# Altium PCB Rackmount_DSP.PcbDoc (part 8 of 24)
Units mil, origin at the board's own origin, x right, y up, seen from the top; angles counter-clockwise.
Board outline 10629.92 x 8267.72 mil, 4 copper layers (Top Layer, Mid Layer 1, Mid Layer 2, Bottom Layer), stack 36.2 mil thick; 4500 components, 1565 nets, 9765 pads, 3289 vias.
Unrouted connection lines stored in the file: 1.
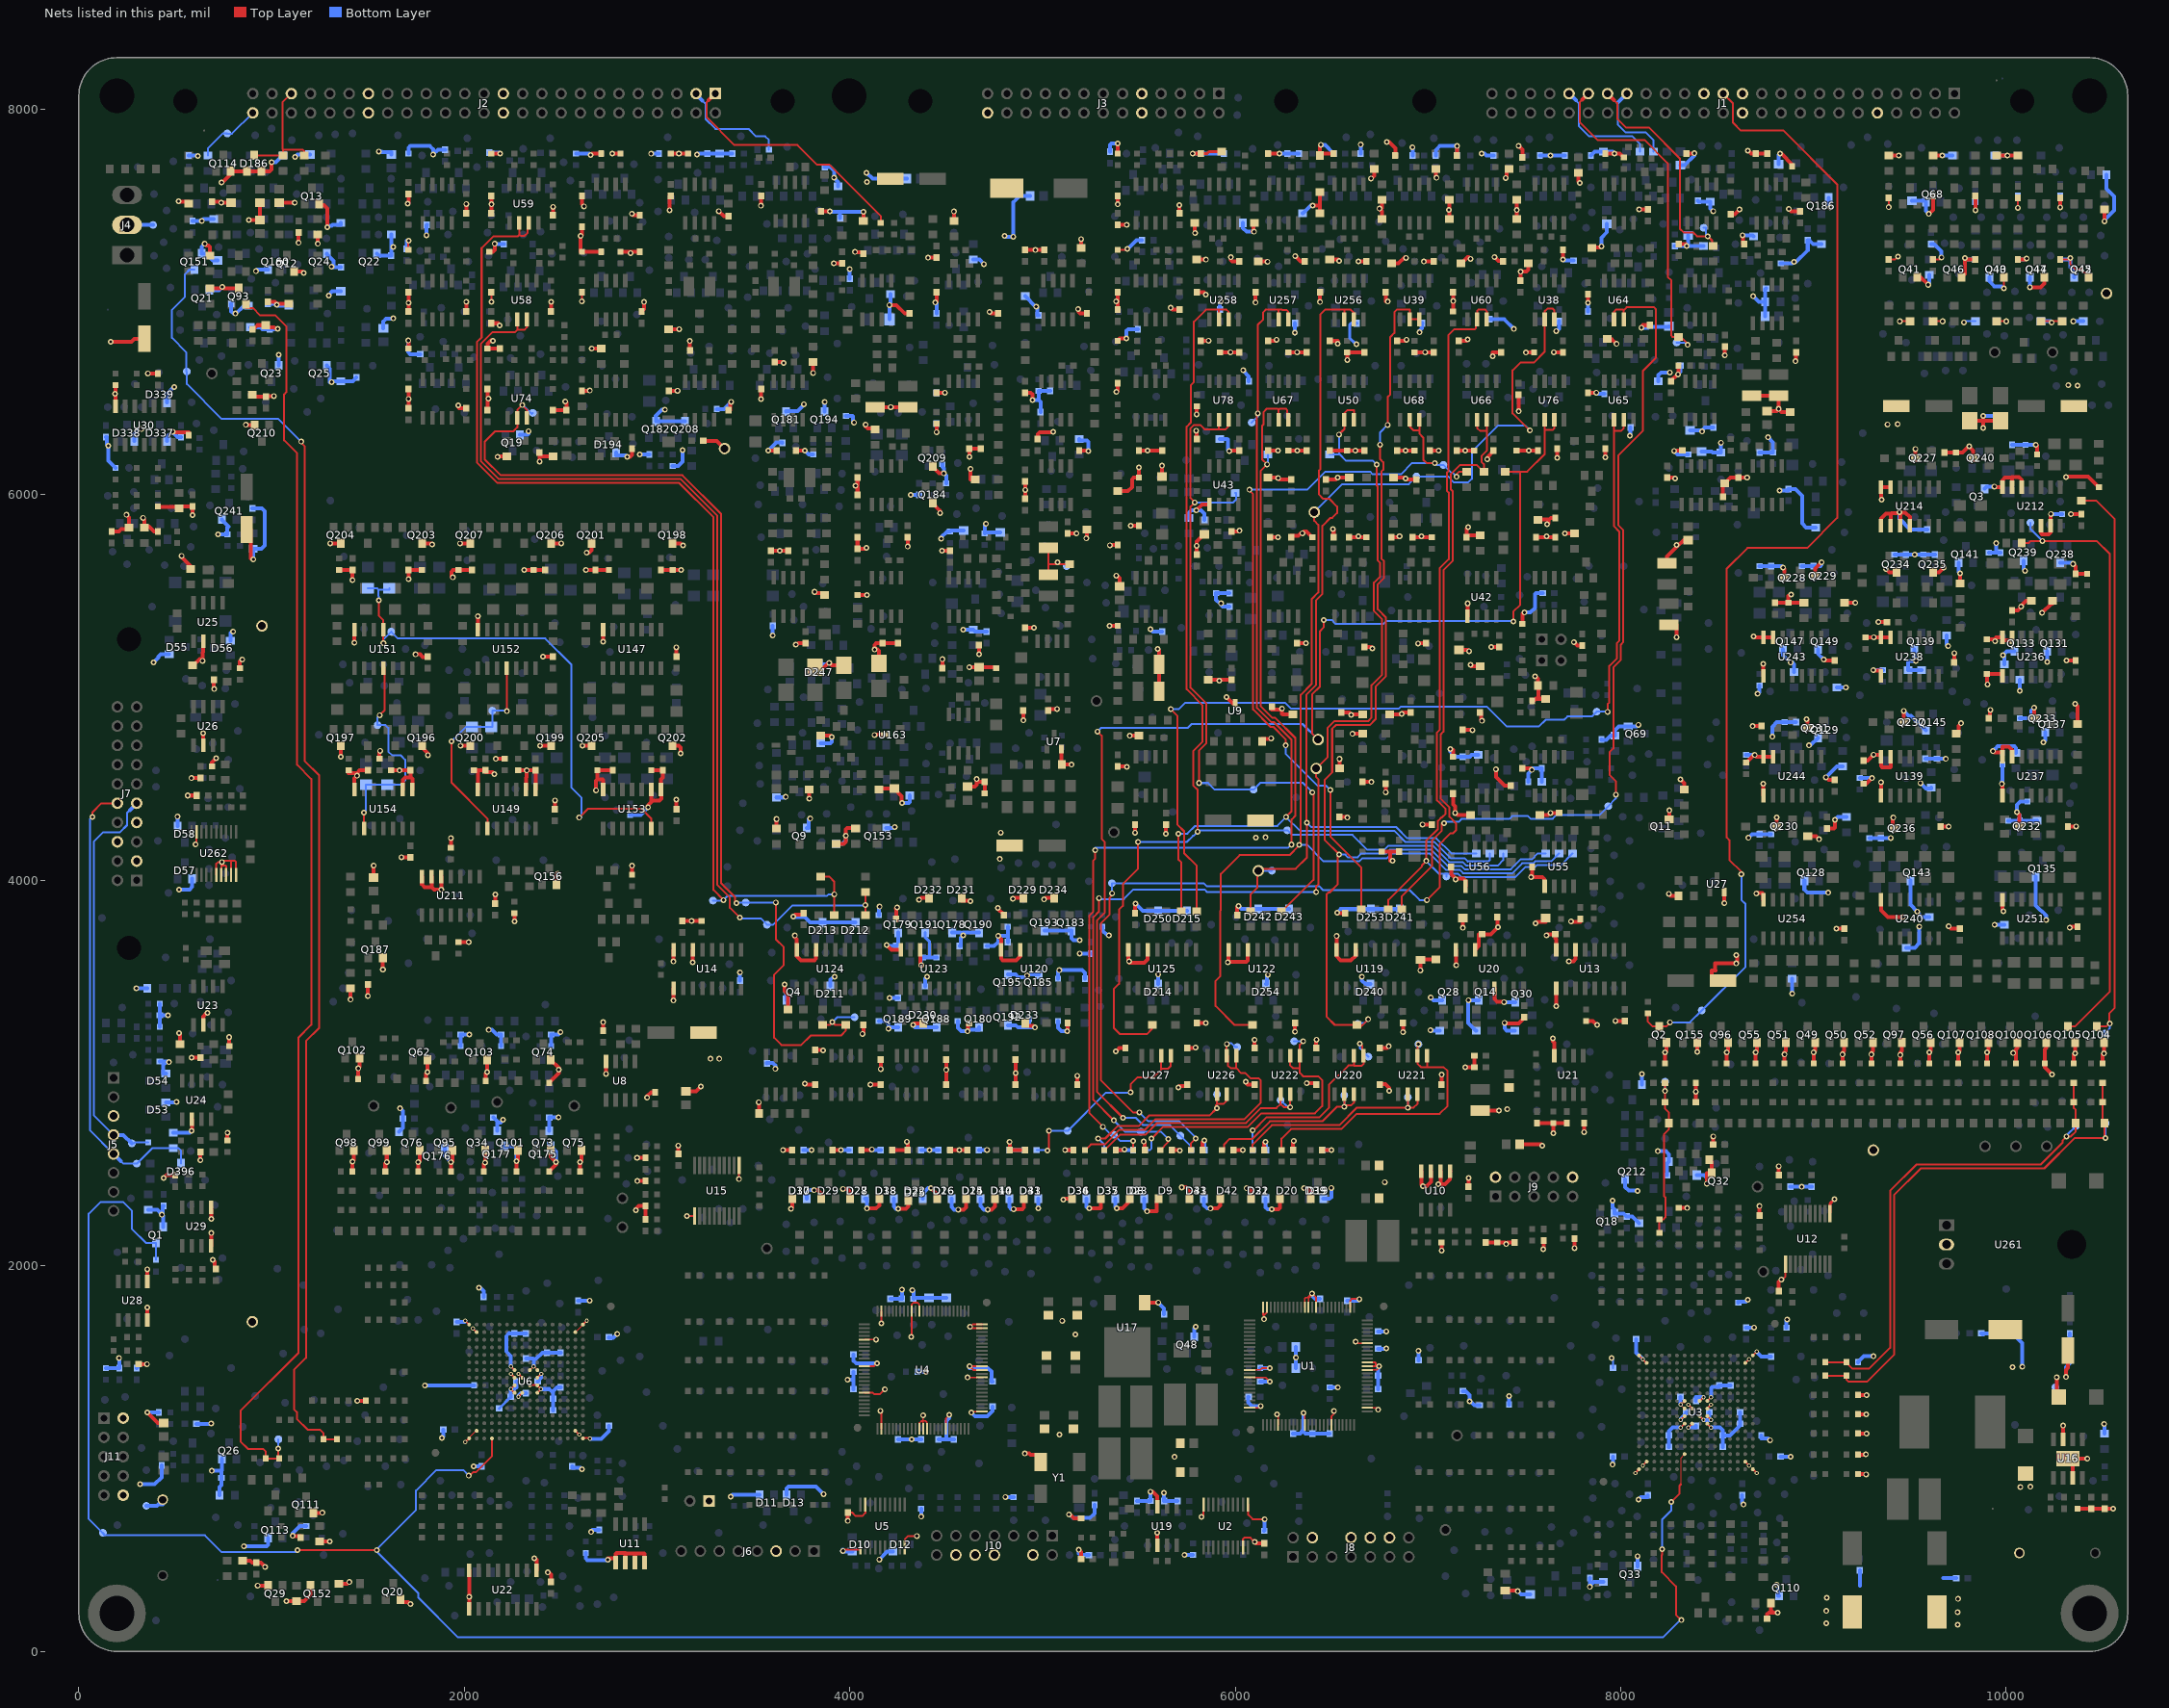
[diagram p10: the nets of this part, all layers, seen from the top]

## Via types
v1: diameter 30, hole 16, Top Layer to Bottom Layer, 3143 vias
v2: diameter 22, hole 12, Top Layer to Bottom Layer, 146 vias

## Nets (pads, with @x,y where several pads share a name; then routed paths per layer and width w, separated by ;. In a path a pad name is that pad's centre, name@x,y a point inside that pad or via, vN(x,y) a via of type N, cw(c..) or ccw(c..) an arc to the next point about the centre after c; other vN are vias at no path point) (continued)
D4_A: R2352.1 R2667.1 TP1574.1 U149.9 U152.11 | length 1155
  Top Layer w10: v1(1933.64,4720.82) 1933.64,4506.06 2120,4319.7 U149.9@2120,4270 ; v1(2220,4877.54) U152.11@2220,5100
  Bottom Layer w10: v1(1933.64,4720.82) 2007.82,4795 R2667.1@2040,4795 R2352.1@2140,4795 2145,4795 TP1574.1@2145,4880 2220,4880 v1(2220,4877.54)
D4_B: R2348.1 R2678.1 TP1575.1 U151.4 U153.13 | length 2781.4
  Top Layer w10: v1(1555.58,5452.21) 1555.58,5374.42 1580,5350 U151.4@1580,5300 v1(1580,5230.27) ; v1(2596.39,4325.61) 2642.54,4371.76 2918.24,4371.76 2970,4320 U153.13@2970,4270
  Bottom Layer w10: R2348.1@1500,5515 1546.5,5515 1554.66,5506.84 ; v1(1555.58,5452.21) 1555.58,5473.28 1554.66,5474.2 1554.66,5506.84 ; v1(1580,5230.27) 1580,5250 TP1575.1@1620,5290 1655,5255 2419.57,5255 2554.16,5120.41 2554.16,4483.07 2607.46,4429.78 2607.46,4325.61 v1(2596.39,4325.61) ; R2678.1@1610,5515 1610,5506.84 1554.66,5506.84
D4_C: R2679.1 R2680.1 TP1576.1 U151.11 U154.9 | length 1155.3
  Top Layer w10: v1(1479.14,4350.74) 1479.14,4270 U154.9@1480,4270 ; v1(1560.24,4856.69) 1586.3,4882.74 1586.3,5100 U151.11@1580,5100
  Bottom Layer w10: v1(1479.14,4350.74) 1490,4361.6 R2679.1@1490,4495 R2680.1@1600,4495 1600.56,4495.56 1669.97,4495.56 1693.22,4518.81 1693.22,4625.37 1671.09,4647.5 1626.67,4647.5 1605.99,4668.18 1605.99,4789.97 1590.96,4805 TP1576.1@1550,4805 1550,4846.45 v1(1560.24,4856.69)
DCBAT+: J1.35 R800.1 TP334.1 | length 458.3
  Bottom Layer w10: 7985.17,8035.17 7985.17,7919.13 8023.73,7880.57 8128.01,7880.57 8170,7838.58 R800.1@8170,7780 ; TP334.1@8030,8080 J1.35@8031.5,8081.5
  Bottom Layer w20: 7985.17,8035.17 TP334.1@8030,8080
DCBAT-: J1.37 R834.1 TP515.1 | length 1213.3
  Top Layer w10: 7964.28,8048.71 7981.5,8031.5 7981.5,7950.89 8026.55,7905.84 8146.24,7905.84 8306.58,7745.49 8306.58,7380.71 8327.29,7360 8376.93,7360 8395.41,7341.52 v1(8450.92,7341.52) 8474.12,7318.32 8474.12,7290 R834.1@8480,7290
  Top Layer w20: J1.37@7931.5,8081.5 7964.28,8048.71
  Bottom Layer w10: TP515.1@8430,7385 8442.44,7385 8442.44,7350 v1(8450.92,7341.52)
DCBUS+: J1.39 R797.1 TP516.1 | length 1784.3
  Top Layer w10: 7800.17,8050.17 7786.5,8036.5 7786.5,7933.88 7879.22,7841.15 8122.72,7841.15 8244.26,7719.61 8244.26,7130.66 8262.18,7112.74 8262.18,6825.66 8267.84,6820 R797.1@8300,6820 8302.5,6820 8312.73,6809.77 8320.9,6809.77 8347.31,6783.36 v1(8347.31,6778.11)
  Top Layer w20: 7800.17,8050.17 J1.39@7831.5,8081.5
  Bottom Layer w10: TP516.1@8290,6790 8335.42,6790 v1(8347.31,6778.11)
DCBUS+OVP: J2.1 R794.1 TP517.1 | length 1300.5
  Top Layer w10: 3267.86,8046.99 3257.36,8036.5 3257.36,7958.49 3401.74,7814.11 3728.18,7814.11 3830.51,7711.78 3895.14,7711.78 4162.33,7444.6 4162.33,7410 R794.1@4160,7410
  Top Layer w20: 3267.86,8046.99 J2.1@3302.36,8081.5
  Bottom Layer w10: J2.1@3302.36,8081.5 3305,8081.5 TP517.1@3305,8080
DCBUS-: J1.41 R832.1 TP333.1 | length 587.5
  Bottom Layer w10: TP333.1@7730,8080 J1.41@7731.5,8081.5 ; 7766.58,8046.42 7781.5,8031.5 7781.5,7913.5 7834.58,7860.42 8058.56,7860.42 8100,7818.97 R832.1@8100,7780
  Bottom Layer w20: J1.41@7731.5,8081.5 7766.58,8046.42
DCBUS-OVP: J2.3 R853.1 TP332.1 | length 579.8
  Bottom Layer w10: TP332.1@3200,8080 3200,8081.5 J2.3@3202.36,8081.5 ; 3235.55,8044.45 3252,8028 3252,7949.13 3302.58,7898.56 3474.33,7898.56 3513.21,7859.68 3560.82,7859.68 3580,7840.5 R853.1@3580,7790
  Bottom Layer w20: TP332.1@3200,8080 3235.55,8044.45
DISPLAY: R905.1 TP331.1 U227.1 U227.2 | length 1083.9
  Top Layer w10: v1(5024.74,2597.82) 5033.66,2606.74 v1(5033.66,2700.51) ; v1(5456.36,2900.74) 5458.5,2900.74 5458.5,2943.56 5493.59,2978.65 5576.71,2978.65 5615,3016.94 5615,3022.59 ; U227.2@5615,3090 5615,3022.59 ; U227.1@5665,3090 5665,3037.75 5649.84,3022.59 5615,3022.59
  Bottom Layer w10: R905.1@4970,2600 5022.56,2600 v1(5024.74,2597.82) ; v1(5033.66,2700.51) 5094.49,2700.51 5095,2700 TP331.1@5130,2700 5326.64,2896.64 5453.21,2896.64 5453.21,2900.74 v1(5456.36,2900.74)
DSP_CHG_PWM+: C846.1 C847.1 R747.1 R1075.1 R1975.1 TP518.1 | length 2860
  Top Layer w10: R1075.1@9060,1430 R747.1@9170,1430 9170,1411.56 9182.56,1399 9277.73,1399 9417.37,1538.64 9417.37,2366.37 9556.84,2505.84 10197.58,2505.84 10355.41,2663.66 v1@10510,2663.66 ; C847.1@10500,2950 C846.1@10500,2850 10500,2740 R1975.1@10510,2740 v1@10510,2663.66 ; v1(10515,2663.66) v1@10510,2663.66
  Bottom Layer w10: v1(10515,2663.66) TP518.1@10515,2740
DSP_CHG_PWM+z: Q104.3 R1111.1 TP519.1 | length 2977.3
  Top Layer w10: R1111.1@10390,5970 10466.25,5970 10562.59,5873.66 10562.59,3337.59 10535.41,3310.41 v1@10535.41,3258.54 ; Q104.3@10470,3241.5 10518.37,3241.5 v1@10535.41,3258.54 ; v1(10537.68,3256.27) v1@10535.41,3258.54
  Bottom Layer w10: TP519.1@10510,3205 10537.68,3232.68 v1(10537.68,3256.27)
DSP_CHG_PWM-: C844.1 C845.1 R758.1 R1076.2 R1976.1 TP520.1 | length 2638.5
  Top Layer w10: R1076.2@9060,1500 R758.1@9170,1500 9170,1499 9203.06,1465.94 9287.98,1465.94 9397.37,1575.34 9397.37,2388.78 9534.43,2525.84 10179.48,2525.84 10291.69,2638.05 10291.69,2650.39 v1(10312.91,2671.6) 10334.73,2671.6 10360,2696.88 R1976.1@10360,2740 10360,2809 10350,2819 C845.1@10350,2850 C844.1@10350,2950
  Bottom Layer w10: v1(10312.91,2671.6) 10312.91,2677.91 TP520.1@10360,2725
DSP_CHG_PWM-z: Q105.3 R1112.1 TP1876.1 | length 3171.9
  Top Layer w10: R1112.1@10080,5750 10116.28,5750 10127.1,5760.82 v1(10187.38,5760.82) 10469.11,5760.82 10537.5,5692.43 10537.5,3424 10355,3241.5 Q105.3@10320,3241.5
  Bottom Layer w10: TP1876.1@10125,5855 10125,5823.21 v1(10187.38,5760.82)
DSP_IR1+: R933.1 R1948.1 TP18.1 TP1744.1 U76.6 U76.7 | length 6693.9
  Top Layer w10: v1(5285.16,4771.76) 5306.72,4750.2 5306.72,4215.05 5323.48,4198.29 5323.48,3832.52 5283.26,3792.3 5283.26,2902.09 v1(5417.5,2767.86) ; TP18.1@6430,4730 6398.18,4761.82 6398.18,4964.2 6438.78,5004.8 6438.78,5291.95 6458.5,5311.67 v1(6458.5,5350.56) ; R1948.1@7400,6120 7478.14,6120 ; v1(7442.5,5342.47) 7442.5,5394.25 7478.14,5429.88 7478.14,6120 ; U76.6@7605,6390 7605,6336.07 ; U76.7@7655,6390 7655,6345 7646.07,6336.07 7605,6336.07 ; 7478.14,6120 7514.71,6120 7605,6210.29 7605,6336.07
  Bottom Layer w10: v1(5285.16,4771.76) 5304.33,4790.93 5753.98,4790.93 5774.02,4810.96 6349.04,4810.96 TP18.1@6430,4730 ; v1(5417.5,2767.86) 5483.85,2767.86 5522.39,2729.32 5661.11,2729.32 TP1744.1@5715.22,2675.22 ; TP1744.1@5715,2675 TP1744.1@5715.22,2675.22 ; R933.1@5770,2600 5770,2620.43 TP1744.1@5715.22,2675.22 ; v1(6458.5,5350.56) 6499.94,5350.56 6520.5,5330 6767.28,5330 6782.18,5344.9 7442.5,5344.9 v1(7442.5,5342.47)
DSP_IR1-: R908.2 R1949.1 TP21.1 TP329.1 U50.6 U50.7 | length 5873.4
  Top Layer w10: v1(5293.48,3907.78) 5293.48,3839.34 5263.25,3809.1 5263.25,2861.15 v1(5370,2754.39) ; R908.2@5610,2600 5651.84,2641.84 v1(5651.84,2658.6) ; v1(6420,3939.35) 6420,3969.35 6431.83,3981.18 6431.83,4523.17 6420,4535 TP21.1@6420,4580 6478.26,4638.26 6478.26,4790.26 6513,4825 6688.71,4825 6707.23,4843.52 6707.23,5012.94 6761.76,5067.47 6761.76,5354.54 6719.06,5397.24 6719.06,5544.44 6751.82,5577.19 6751.82,5646.89 6737.5,5661.2 6737.5,6044.5 6733.45,6048.55 v1(6733.45,6156.65) ; v1(6537.5,6313.05) 6558.71,6334.27 6559.27,6334.27 6565,6340 U50.6@6565,6390 6565,6423.63 6581.38,6440.01 6615,6440.01 U50.7@6615,6390
  Bottom Layer w10: v1(5293.48,3907.78) 5293.48,3902.57 5421.81,3902.57 5471.53,3952.28 5840.23,3952.28 5853.16,3939.35 v1(6420,3939.35) ; v1(5370,2754.39) 5429.39,2695 TP329.1@5510,2695 5615.44,2695 v1(5651.84,2658.6) ; R1949.1@6490,6210 6537.5,6210 ; v1(6537.5,6313.05) 6537.5,6210 ; v1(6733.45,6156.65) 6712.23,6177.86 6573.33,6177.86 6541.19,6210 6537.5,6210
DSP_IR2+: R1199.1 R2569.1 TP24.1 TP328.1 U38.6 U38.7 | length 6962.1
  Top Layer w10: R1199.1@6090,3250 5996.52,3250 5898.7,3347.82 5897.41,3347.82 5897.41,3477.91 5922.55,3503.05 5922.55,3842.54 5925.39,3845.38 5925.39,4033.76 6022.76,4131.13 6281.34,4131.13 6330.5,4180.3 6330.5,4184.19 v1(6331.77,4184.19) 6339.46,4184.19 6339.46,4962.06 6396.31,5018.9 6396.31,5458.32 6431,5493.01 6431,5844 6410,5865 TP24.1@6410,5910 ; v1(7528.49,6334.66) 7528.49,6332.92 7528,6332.92 7439,6421.91 7439,6645.75 7479.4,6686.15 7548.36,6686.15 7605,6742.79 U38.6@7605,6910 7605,6951.88 7620.4,6967.28 7644.94,6967.28 7655,6957.22 U38.7@7655,6910
  Bottom Layer w10: v1(6331.77,4184.19) 6371.94,4184.19 6456.13,4100 6644.16,4100 6659.36,4115.19 6786.26,4115.19 6809.33,4138.26 7009.57,4138.26 7092.61,4055.22 7163.7,4055.22 7181.08,4037.84 7438,4037.84 7488.36,4088.2 7495.57,4088.2 7495.8,4088.43 7546.24,4088.43 7556.1,4098.28 7638.28,4098.28 R2569.1@7680,4140 ; TP24.1@6410,5910 6555,6055 6900,6055 TP328.1@6940,6095 7104.06,6095 7135.25,6063.81 7207.86,6063.81 7227.29,6083.24 7227.29,6222.33 7364.77,6359.81 7503.33,6359.81 v1(7528.49,6334.66)
DSP_IR2+/VBUS_P: R928.2 TP1562.1 U220.1 U220.2 | length 1145.6
  Top Layer w10: v1(6089.91,2702.95) 6094.35,2702.95 6162.84,2771.45 6436.68,2771.45 6485.25,2820.02 6485.25,2938.53 6586.72,3040 6615,3040 ; U220.2@6615,3090 6615,3040 ; v1(6646.46,3152.58) 6658.5,3140.54 6658.5,3090 U220.1@6665,3090 6665,3046.82 6656.24,3038.07 6615,3038.07 6615,3040
  Bottom Layer w10: v1(6089.91,2702.95) 6090,2702.95 R928.2@6090,2600 ; v1(6646.46,3152.58) 6646.46,3128.54 TP1562.1@6690,3085
DSP_IR2-: R1166.1 R2571.1 TP27.1 TP522.1 U256.6 U256.7 | length 4750.1
  Top Layer w10: R1166.1@6080,3840 6080,3927.7 6114.77,3962.47 6114.77,4050 TP27.1@6120,4050 6129.3,4059.3 6312.97,4059.3 6371.43,4117.76 v1(6371.43,4298.8) 6369.94,4298.8 6369.94,4964.25 6418.57,5012.87 6418.57,5452.3 6451.95,5485.68 6451.95,5838.82 6493.75,5880.62 6502.68,5880.62 6528.04,5905.97 6528.04,5938.93 6487.15,5979.82 6455.47,5979.82 6434.37,6000.91 6434.37,6126.72 6442.32,6134.66 6442.32,6937.09 6465.22,6960 6565,6960 ; U256.6@6565,6910 6565,6960 ; U256.7@6615,6910 6615,6944 6597.86,6961.14 6565,6961.14 6565,6960
  Bottom Layer w10: TP27.1@6120,4050 TP522.1@6190,4050 ; v1(6371.43,4298.8) 6394.97,4275.25 6836.04,4275.25 6893.03,4218.26 7042.88,4218.26 7121.14,4140 R2571.1@7250,4140
DSP_IR2-/VBUS_N: R930.1 TP523.1 U222.6 U222.7 | length 1253.8
  Top Layer w10: R930.1@5320,2600 5321,2600 5401.32,2680.32 5533.99,2680.32 5594.55,2740.88 6055.56,2740.88 6133.51,2818.83 6213.83,2818.83 6235,2840 ; U222.6@6235,2890 6235,2840 ; U222.7@6285,2890 6285,2823.01 v1(6284.91,2822.92) 6252.08,2822.92 6235,2840
  Bottom Layer w10: TP523.1@6235,2860 6272.08,2822.92 v1(6284.91,2822.92)
DSP_IS1+: R925.1 R1952.1 TP293.1 U66.6 U66.7 | length 6367
  Top Layer w10: v1(5360.91,3932.76) 5360.91,3927.54 5366.21,3927.54 5348.14,3909.47 5348.14,3822.29 5303.59,3777.74 5303.59,2962.35 5469.64,2796.31 v1(5501.75,2796.31) ; R925.1@5770,2600 5770,2636.3 v1(5794.76,2661.06) ; v1(6994.43,3897.88) 7060.53,3963.98 7060.53,4187.84 7081.41,4208.72 7081.41,4209.62 7115.19,4243.4 7128.08,4243.4 7145.65,4260.97 7145.65,4294.52 7111.13,4329.04 7111.13,4378.22 7066.78,4422.57 7066.78,4758.51 7080,4771.72 7080,5609.53 7127.5,5657.03 7127.5,6019.69 7117.67,6029.52 7117.67,6106.24 7166.43,6155 7252.5,6155 7287.5,6120 R1952.1@7290,6120 7290,6158.36 7276.9,6171.46 7276.9,6200.76 7305,6228.86 7305,6330.74 ; U66.6@7255,6390 7255,6346.43 7270.69,6330.74 7305,6330.74 ; U66.7@7305,6390 7305,6330.74
  Bottom Layer w10: v1(5360.91,3932.76) 5360.91,3927.54 5366.21,3927.54 5360,3933.75 TP293.1@5360,3985 5835.8,3985 5850.92,3969.88 6434.72,3969.88 6455.51,3949.09 6905.68,3949.09 6956.9,3897.88 v1(6994.43,3897.88) ; v1(5501.75,2796.31) 5548.74,2749.32 5710.52,2749.32 5794.76,2665.08 v1(5794.76,2661.06)
DSP_IS1-: R914.1 R1953.1 TP1563.1 U67.6 U67.7 | length 5411.7
  Top Layer w10: v1(5273.48,4156.02) 5273.48,4112.03 5261.62,4100.18 5261.62,3835.76 5243.23,3817.37 5243.23,2792.07 v1(5313.68,2721.63) ; R914.1@5470,2600 v1(5470,2648.75) ; U67.6@6225,6390 6225,6440 ; U67.7@6275,6390 6268.5,6390 6268.5,6440 6261.83,6446.67 6231.67,6446.67 6225,6440 ; v1(6291.77,4185.25) 6291.77,4315.75 6311.33,4335.31 6311.33,4738.53 6205.9,4843.96 6191.32,4843.96 6132.5,4902.79 6132.5,6125.67 v1(6165,6158.17) 6139,6184.17 6139,6358.13 6147.5,6366.63 6147.5,6430.38 6163.78,6446.65 6218.35,6446.65 6225,6440
  Bottom Layer w10: v1(5273.48,4156.02) 5273.48,4167.93 6272.35,4167.93 6289.67,4185.25 v1(6291.77,4185.25) ; v1(5313.68,2721.63) 5355.3,2680 TP1563.1@5370,2680 5401.25,2648.75 v1(5470,2648.75) ; v1(6165,6158.17) 6170,6158.17 R1953.1@6170,6210
DSP_IS2+: R1160.1 R2573.1 TP1745.1 U60.6 U60.7 | length 4365.6
  Top Layer w10: R1160.1@6794.31,3849.09 6794.31,3898.51 6969.31,4073.52 6969.31,4079.2 v1(6990.53,4100.41) 6990.53,4205.81 7051.08,4266.36 7051.08,4307.82 7070.55,4327.29 7073.28,4327.29 7091.11,4345.11 7091.11,4369.96 7046.78,4414.28 7046.78,4766.79 7060,4780.01 7060,5617.81 7107.5,5665.31 7107.5,6011.41 7097.67,6021.23 7097.67,6114.52 7106.64,6123.49 7106.64,6829.64 7135.36,6858.36 7241.85,6858.36 7248.5,6865.01 7248.5,6910 U60.6@7255,6910 7255,6954.25 7260.75,6960 7296.7,6960 7305,6951.7 U60.7@7305,6910
  Bottom Layer w10: v1(6990.53,4100.41) 7055.71,4035.22 TP1745.1@7095,4035.22 ; TP1745.1@7095,4020 TP1745.1@7095,4035.22 ; R2573.1@7750,4140 7688.28,4078.28 7564.39,4078.28 7554.53,4068.43 7504.09,4068.43 7453.5,4017.84 7172.8,4017.84 7155.42,4035.22 TP1745.1@7095,4035.22
DSP_IS2+/DSP_VCHG+: R912.2 TP525.1 U221.6 U221.7 | length 1145.7
  Top Layer w10: R912.2@6090,2600 6090,2630 6189.88,2729.88 6540.36,2729.88 6631.1,2820.63 v1(6895,2820.63) ; U221.6@6895,2890 v1(6895,2820.63) ; U221.7@6945,2890 6945,2840 6925.63,2820.63 v1(6895,2820.63)
  Bottom Layer w10: v1(6895,2820.63) TP525.1@6895,2875
DSP_IS2-: R1172.1 R2567.1 TP291.1 U257.6 U257.7 | length 5215.3
  Top Layer w10: v1(5703.89,4242.17) 5703.89,4109.19 5720,4093.08 R1172.1@5720,3840 ; U257.6@6225,6910 6225,6960 ; v1(6262.81,4329.22) 6291.33,4357.73 6291.33,4730.25 6201.49,4820.09 6186.91,4820.09 6112.5,4894.5 6112.5,6422.48 v1(6116.51,6422.48) 6116.51,6882.59 6144.29,6910.37 6144.29,6947 6157.29,6960 6225,6960 ; U257.7@6275,6910 6275,6949.86 6265.82,6959.04 6243.67,6959.04 6242.71,6960 6225,6960
  Bottom Layer w10: v1(5703.89,4242.17) 5751.55,4242.17 5791.96,4282.59 6217.81,4282.59 v1@6263.62,4328.4 ; TP291.1@6085,6375 6116.51,6406.51 v1(6116.51,6422.48) ; v1(6262.81,4329.22) 6264.44,4329.22 v1@6263.62,4328.4 ; R2567.1@7320,4140 7320,4105 7312.84,4097.84 7205.94,4097.84 7188.55,4115.22 7117.46,4115.22 7034.42,4198.26 6883.3,4198.26 6826.31,4255.25 6336.78,4255.25 v1@6263.62,4328.4
DSP_IS2-/DSP_VCHG-: R906.1 TP526.1 U226.1 U226.2 | length 1578.8
  Top Layer w10: R906.1@5220,2600 5221,2600 5251.22,2630.22 5322.94,2630.22 5397.01,2704.29 5529.68,2704.29 5586.26,2760.88 6047.03,2760.88 6131,2844.84 6131,2963.71 6121.42,2973.29 6078.49,2973.29 6051.87,2999.92 6030.55,2999.92 6005,3025.47 ; v1(5955.86,3151.19) 5955.86,3140.86 5955,3140 U226.2@5955,3090 5961.5,3090 5961.5,3040 5976.03,3025.47 6005,3025.47 ; U226.1@6005,3090 6005,3025.47
  Bottom Layer w10: v1(5955.86,3151.19) 5959.52,3151.19 5963.18,3154.85 5980.35,3154.85 6000.2,3135 TP526.1@6010,3135
DSP_IT1+: R1198.1 R1950.1 TP290.1 U68.6 U68.7 | length 4070.1
  Top Layer w10: v1(6073.42,6026.04) 6073.42,6021.76 6092.5,6002.69 6092.5,4886.22 6182.72,4796 6197.29,4796 6261.23,4732.06 v1(6261.23,4700.12) ; v1(6492.6,4468.9) 6492.6,4227.67 6654.31,4065.96 R1198.1@6654.31,3849.09 ; U68.6@6905,6390 6905,6354.24 6924.98,6334.26 6955,6334.26 ; U68.7@6955,6390 6955,6334.26 ; v1(7034.6,6164.74) 6992.62,6164.74 6975.29,6182.07 6975.29,6296.93 6955,6317.21 6955,6334.26 ; v1(7147.67,6093.81) 7147.67,6105.17 7162.5,6120 R1950.1@7200,6120
  Bottom Layer w10: v1(6073.42,6026.04) 6373.12,6026.04 6467.08,6120 6699.39,6120 6712.74,6106.65 6858.58,6106.65 6916.67,6164.74 v1(7034.6,6164.74) 7043.58,6155.76 7044.24,6155.76 7045,6155 TP290.1@7080,6155 7119.97,6115.03 7126.46,6115.03 v1(7147.67,6093.81) ; v1(6261.23,4700.12) 6261.23,4657.29 6428.41,4490.11 6471.39,4490.11 v1(6492.6,4468.9)
DSP_IT1+/IBAT+_CHG: R927.1 TP527.1 U220.6 U220.7 | length 969.4
  Top Layer w10: R927.1@5930,2600 5941.74,2600 5941.74,2630 5970.95,2659.21 6089.09,2659.21 6179.99,2750.11 6451.38,2750.11 6526.5,2825.24 v1(6565,2825.24) v1@6565,2833.16 ; U220.6@6565,2890 v1@6565,2833.16 ; U220.7@6615,2890 6615,2846.6 6601.55,2833.16 v1@6565,2833.16
  Bottom Layer w10: v1(6565,2825.24) TP527.1@6565,2885
DSP_IT1-: R1164.1 R1951.1 TP289.1 U78.6 U78.7 | length 3803.1
  Top Layer w10: v1(5811.31,4504.92) 5811.31,4534.92 5810.94,4535.3 5810.94,4671.54 5850.63,4711.24 5850.63,4915.99 5768.13,4998.49 5768.13,5939.49 v1(5789.48,5960.84) 5767.45,5982.88 5767.45,6345.2 5785.03,6362.77 5817.2,6362.77 5839.97,6340 5914.12,6340 ; U78.6@5915,6390 5915,6340.88 5914.12,6340 ; U78.7@5965,6390 5965,6354.78 5950.22,6340 5914.12,6340 ; R1164.1@6240,3840 6242.5,3840 6405.32,4002.82 6405.32,4456.52 v1(6399.94,4456.52)
  Bottom Layer w10: v1(5789.48,5960.84) 5989.17,5960.84 6003.04,5974.72 6003.04,6010 R1951.1@6000,6010 ; v1(5811.31,4504.92) 5858.43,4504.92 5893.36,4470 TP289.1@6095,4470 6131.21,4506.21 6350.25,4506.21 v1(6399.94,4456.52)
DSP_IT1-/IBAT-_CHG: R911.1 TP528.1 U222.1 U222.2 | length 1636.1
  Top Layer w10: v1(5565.28,2660.45) 5625.7,2720.88 6065.19,2720.88 6135.76,2791.45 6413.69,2791.45 6451,2828.76 6451,2963.71 6432.4,2982.31 6353.97,2982.31 6335,3001.28 6335,3026.13 ; U222.2@6285,3090 6285,3040 6298.87,3026.13 6335,3026.13 ; v1(6352.26,3164.46) 6335,3147.2 U222.1@6335,3090 6335,3026.13
  Bottom Layer w10: R911.1@5530,2600 5556.49,2600 5565.28,2608.79 v1(5565.28,2660.45) ; TP528.1@6305,3165 6340,3165 6340.54,3164.46 v1(6352.26,3164.46)
DSP_IT2+: R1156.1 R2572.1 TP529.1 U39.6 U39.7 | length 5704.6
  Top Layer w10: v1(6689.44,3279.1) 6655.11,3244.78 6630,3244.78 R1156.1@6630,3250 6516.11,3250 6474.47,3291.64 6474.47,3929.03 6482.33,3936.89 6488.77,3936.89 6530.78,3978.9 6530.78,4125.5 6530.99,4125.5 6531.95,4126.46 6531.95,4126.67 6539.23,4133.95 v1(6539.44,4133.95) 6462.6,4210.78 6462.6,4520.14 6502.5,4560.04 6502.5,4786.21 6521.29,4805 6697,4805 6727.96,4835.96 6727.96,5005.39 6781.76,5059.18 6781.76,5362.83 6739.06,5405.53 6739.06,5536.15 6771.82,5568.91 6771.82,5655.17 6757.9,5669.08 6757.9,6119.9 6768.09,6130.09 6768.09,6168.72 6751,6185.81 v1(6751,6260.27) ; v1(6790,6362.85) 6790,6506.61 6804.19,6520.79 6804.19,6818.9 6824.75,6839.46 6824.75,6947.46 6837.29,6960 6905,6960 U39.6@6905,6910 U39.7@6955,6910
  Bottom Layer w10: v1(6539.44,4133.95) 6569.44,4133.95 6583.38,4120 6635.88,4120 6655.88,4140 6782.78,4140 6801.05,4158.26 7017.85,4158.26 7100.89,4075.22 7171.98,4075.22 7189.37,4057.84 7429.3,4057.84 7479.89,4108.43 7537.96,4108.43 7569.53,4140 R2572.1@7610,4140 ; TP529.1@6635,3255 6635,3259.66 6670,3259.66 v1(6689.44,3279.1) ; v1(6751,6260.27) 6751,6323.85 v1(6790,6362.85)
DSP_IT2+/VBAT+: R917.2 TP530.1 U221.1 U221.2 | length 1507.7
  Top Layer w10: R917.2@6240,2600 6240,2659.89 6289.77,2709.66 6550.67,2709.66 6629.1,2788.09 7060.13,2788.09 7101,2828.95 7101,3010.5 7080.44,3031.06 6995,3031.06 ; v1(6950,3150) 6945,3145 U221.2@6945,3090 6945,3048.5 6963.17,3030.33 6995,3030.33 6995,3031.06 ; U221.1@6995,3090 6995,3031.06
DSP_IT2-: R1171.1 R2566.1 TP288.1 U258.6 U258.7 | length 6353.1
  Top Layer w10: v1(5495.88,4199.03) 5495.88,4060.78 5416.31,3981.21 5416.31,3867.19 5396.35,3847.22 5396.35,3463.37 5368.72,3435.74 5368.72,3234.92 5402.33,3201.31 5540.34,3201.31 5566.64,3227.6 5566.64,3250 R1171.1@5570,3250 ; v1(5804.44,4252.33) 5804.44,4469.37 5781.31,4492.5 5781.31,4670.2 5830.63,4719.52 5830.63,4907.71 5747.45,4990.88 5747.45,6353.48 5768.36,6374.39 5768.36,6567.72 5785.48,6584.85 5785.48,6898.19 5847.29,6960 5915,6960 ; U258.6@5915,6910 5915,6960 ; U258.7@5965,6910 5965,6950.04 5954.03,6961.01 5915,6961.01 5915,6960
  Bottom Layer w10: v1(5495.88,4199.03) 5748.48,4199.03 5780.57,4231.11 5783.23,4231.11 v1(5804.44,4252.33) 5804.44,4260 TP288.1@6270,4260 6270.85,4260 6295.17,4235.68 6327.27,4235.68 6327.7,4235.25 6607.55,4235.25 6682.8,4160 6774.5,4160 6792.76,4178.26 7026.14,4178.26 7109.18,4095.22 7180.27,4095.22 7197.65,4077.84 7363.45,4077.84 7390,4104.39 R2566.1@7390,4140
DSP_IT2-/VBAT-: R910.1 TP531.1 U226.6 U226.7 | length 995.8
  Top Layer w10: v1(5288.69,2660.44) 5324.87,2660.44 5388.73,2724.29 5498.1,2724.29 5554.68,2780.88 5867.27,2780.88 5899.34,2812.95 v1@5899.34,2817.9 ; v1(5904.36,2817.9) v1@5899.34,2817.9 ; U226.6@5905,2890 5905.52,2890 5905.52,2839.48 ; U226.7@5955,2890 5955,2855.6 5938.88,2839.48 5905.52,2839.48 ; v1@5899.34,2817.9 5899.34,2833.3 5905.52,2839.48
  Bottom Layer w10: v1(5288.69,2660.44) 5309.9,2639.23 5310.77,2639.23 5320,2630 R910.1@5320,2600 ; v1(5904.36,2817.9) 5904.36,2854.36 5905,2855 TP531.1@5905,2890
DSP_VCHG+: R1162.1 TP1564.1 U64.6 U64.7 | length 4496.4
  Top Layer w10: R1162.1@6864.31,3849.09 6864.31,3916.94 7020.53,4073.16 7020.53,4204.41 7021.36,4205.24 7021.36,4206.9 7071.08,4256.62 7071.08,4297.04 v1(7082.72,4297.04) ; U64.6@7965,6910 7965,6950.85 7975.63,6961.48 8011.73,6961.48 8015.29,6957.93 ; v1(7974.08,4444.85) 7974.08,4514.63 7941.15,4547.56 7941.15,4664.48 7961.38,4684.7 7961.38,5105.36 8000.26,5144.24 8000.26,5222.95 8011.72,5234.41 8011.72,5818.19 7987.96,5841.95 7987.96,6205.68 8113.67,6331.39 8113.67,6641.62 8181,6708.95 8181,6963.71 8172.21,6972.5 8029.86,6972.5 8015.29,6957.93 ; U64.7@8015,6910 8015,6957.64 8015.29,6957.93
  Bottom Layer w10: v1(7082.72,4297.04) 7082.72,4303.4 7158.4,4303.4 7172.92,4317.92 7422.19,4317.92 7437.21,4332.94 7518.63,4332.94 7531.58,4320 7646.95,4320 7664.76,4337.8 7887.8,4337.8 TP1564.1@7935,4385 7974.08,4424.08 v1(7974.08,4444.85)
DSP_VCHG-: R1222.1 TP286.1 U65.6 U65.7 | length 5129.8
  Top Layer w10: v1(5665.55,4888.09) 5700.52,4853.12 5700.52,4287.96 5734.44,4254.05 5734.44,4140.11 5800,4074.55 R1222.1@5800,3840 ; v1(7931.38,4874.45) 7931.38,4913.59 7940,4922.21 7940,5112.27 7980.26,5152.53 7980.26,5231.23 7991.72,5242.69 7991.72,5809.91 7965,5836.62 7965,6330.91 ; U65.6@7965,6390 7965,6330.91 ; U65.7@8015,6390 8015,6344.85 8001.06,6330.91 7965,6330.91
  Bottom Layer w10: v1(5665.55,4888.09) 5706.56,4888.09 5739.89,4921.43 6258.39,4921.43 6290.08,4889.74 6848.09,4889.74 6860.21,4901.86 7304.7,4901.86 7409.27,4797.28 7574.57,4797.28 7610.48,4833.19 7706.66,4833.19 7723.46,4850 7850,4850 TP286.1@7875,4875 7930.83,4875 v1(7931.38,4874.45)
DSP_VOUT_A: R1113.1 R1218.1 TP285.1 TP806.1 TP1005.1 U74.6 U74.7 | length 5641
  Top Layer w10: U74.7@2325,6400 2325,6440.62 v1(2299.92,6465.69) 2275,6440.77 U74.6@2275,6400 2275,6350 2254.35,6329.35 2160.06,6329.35 2105.12,6274.41 2105.12,6184.39 2188.45,6101.06 3131.16,6101.06 3332.41,5899.82 3332.41,3984.13 3404.28,3912.26 3404.28,3882.26 v1(3411.81,3882.26) ; v1(3615.51,3885.48) 3615.82,3885.48 3615.82,3694.51 3655.47,3654.85 3655.47,3558.49 3606.92,3509.94 3606.92,3183.57 3645.23,3145.26 3747.36,3145.26 3797.1,3195 3954.21,3195 3980,3220.79 R1113.1@3980,3250 3923.81,3250 v1(3909.42,3264.39) 3909.42,3261.92 3897.5,3250 R1218.1@3860,3250
  Bottom Layer w10: v1(2299.92,6465.69) 2304.29,6465.69 2349.99,6419.99 TP1005.1@2355,6425 ; v1(3411.81,3882.26) 3411.81,3877.84 3405.57,3877.84 3412.46,3884.73 3424.73,3884.73 3425,3885 TP285.1@3460,3885 3587.22,3885 3587.69,3885.48 v1(3615.51,3885.48) ; v1(3909.42,3264.39) 3934.86,3289.83 4025,3289.83 TP806.1@4025,3290
DSP_VOUT_B: R1114.1 R1219.1 TP284.1 U58.6 U58.7 | length 5284.8
  Top Layer w10: U58.6@2275,6910 2275,6855.9 ; U58.7@2325,6910 2325,6869.69 2311.2,6855.9 2275,6855.9 ; v1(3428.67,3807.36) 3378.07,3857.97 3378.07,3910.18 3312.41,3975.84 3312.41,5891.53 3122.88,6081.06 2180.17,6081.06 2085.12,6176.11 2085.12,6783.38 2146.17,6844.43 2263.53,6844.43 2275,6855.9 ; R1114.1@4080,3820 v1(4080,3871.51) R1219.1@4080,3940
  Bottom Layer w10: v1(3428.67,3807.36) 3433.49,3802.55 3537.45,3802.55 TP284.1@3570,3770 3602.39,3770 3701.95,3869.56 4080,3869.56 v1(4080,3871.51)
DSP_VOUT_C: R1115.1 R1220.1 TP283.1 U59.6 U59.7 | length 5765.2
  Top Layer w10: U59.6@2285,7410 2285,7348.73 ; U59.7@2335,7410 2328.5,7410 2328.5,7359.74 2313.04,7344.28 2292.07,7344.28 2287.62,7348.73 2285,7348.73 ; v1(3344.33,3897.74) 3292.41,3949.66 3292.41,5883.25 3114.6,6061.06 2171.88,6061.06 2065.12,6167.82 2065.12,6791.97 2089.5,6816.34 2089.5,7280.08 2151.08,7341.66 2277.93,7341.66 2285,7348.73 ; R1220.1@3850,4020 3891.67,4020 3920,3991.67 v1(3920,3927.84) R1115.1@3920,3820
  Bottom Layer w10: TP283.1@3290,3895 3341.6,3895 v1(3344.33,3897.74) 3367.01,3920.41 3882.57,3920.41 3890,3927.84 v1(3920,3927.84)
EPO: Q1.3 R631.1 TP301.1 U3.K14 U6.N16 | length 12715.1
  Top Layer w6: 8311.94,868.6 8311.94,1004.46 U3.K14@8330.94,1023.46
  Top Layer w10: v1(1134.82,525.19) v1(1545.54,525.19) ; v1(2022.44,911.42) 2027.71,911.42 2046.29,930 2060.99,930 2080.99,950 2142.83,1011.84 U6.N16@2142.83,1104.72 ; v1(8214.39,530.58) 8214.39,500.58 8212.82,499.01 8212.82,410.96 8286.77,337 8286.77,190.06 v1(8314.56,162.28) ; v1(8262.27,775.45) 8304.61,817.79 8304.61,835 8304.61,859.93 8311.94,867.27 8311.94,868.6
  Bottom Layer w10: TP301.1@128.82,608.82 TP301.1@130,607.65 ; R631.1@400,2030 Q1.3@400,2118.5 348.16,2118.5 276.25,2190.41 276.25,2285.44 231.18,2330.51 111.58,2330.51 51.01,2269.94 51.01,686.63 123.82,613.82 TP301.1@125,615 130,610 TP301.1@130,607.65 ; v1(1134.82,525.19) 1134.82,514.54 741.69,514.54 654.51,601.72 130,601.72 TP301.1@130,607.65 ; v1(2022.44,911.42) 2022.44,912.21 1993.82,940.83 1855.51,940.83 1749.23,834.56 1749.23,733.73 1545.54,530.04 v1(1545.54,525.19) 1545.54,517.72 1761.17,302.09 1761.17,279.56 1967.93,72.79 8218.46,72.79 8307.94,162.28 v1(8314.56,162.28) ; v1(8214.39,530.58) 8214.39,684.6 8262.27,732.49 v1(8262.27,775.45)
EPO+: J5.4 J7.9 R988.1 TP300.1 | length 2107.6
  Bottom Layer w10: J5.4@180,2679.21 76.7,2782.52 76.7,4200.38 126.32,4250 213.64,4250 250,4286.36 250,4350 264.92,4364.92 ; TP300.1@275,2635 285,2635 290,2640 R988.1@360,2640
  Bottom Layer w20: J5.4@180,2679.21 230.79,2679.21 TP300.1@275,2635 ; 264.92,4364.92 J7.9@300,4400
EPO-: D396.3 J5.5 J7.10 R680.1 TP299.1 | length 2455.6
  Top Layer w10: v1(70.36,4329.16) 70.36,4353.33 117.03,4400 J7.10@200,4400
  Bottom Layer w10: v1(70.36,4329.16) 67.2,4329.16 56.7,4318.66 56.7,2704.09 J5.5@180,2580.79 ; 216.86,2543.93 230.79,2530 TP299.1@300,2530 380,2610 R680.1@490,2610 517.79,2610 530,2597.79 D396.3@530,2531.5
  Bottom Layer w20: J5.5@180,2580.79 216.86,2543.93
FAN_DSP_PWM: C469.1 C478.1 R756.1 R960.1 R1017.1 TP1577.1 | length 878.6
  Top Layer w10: R1017.1@8200,2170 R756.1@8200,2240 8219.72,2240 8231,2251.28 8231,2355.66 8223.86,2362.8 8223.86,2682.07 8250,2708.21 R960.1@8250,2740 8250,2794.27 8228.34,2815.94 8228.34,2850 C478.1@8230,2850 v1@8230,2906.86 ; v1(8228.84,2906.86) v1@8230,2906.86 ; C469.1@8230,2950 v1@8230,2906.86
  Bottom Layer w10: v1(8228.84,2906.86) 8230,2908.02 TP1577.1@8230,2955
FAN_FAULT: J2.50 R2206.1 TP298.1 | length 351.4
  Bottom Layer w10: R2206.1@670,7760 670,7799.04 742.36,7871.4 745.96,7875 763.36,7875 763.36,7873.15 TP298.1@770,7873.15 ; TP298.1@770,7875 TP298.1@770,7873.15 ; J2.50@902.36,7981.5 794.02,7873.15 TP298.1@770,7873.15
FAN_FAULT_IN: Q151.3 R740.2 R1044.2 TP297.1 | length 6847.7
  Top Layer w10: v1(1153.43,6275.74) 1153.43,6270.51 1172.42,6251.51 1172.42,4618.17 1246.48,4544.11 1246.48,3233.9 1178.48,3165.9 1178.48,1522.46 1116.55,1460.53 1116.55,1255.08 1130.84,1240.79 1130.84,1205.96 1186.8,1150 1250.63,1150 1270,1130.63 R740.2@1270,1100 R1044.2@1340,1100
  Bottom Layer w10: Q151.3@600,7168.5 574.79,7168.5 550,7143.71 550,7026.47 482.6,6959.07 482.6,6814.16 556.83,6739.93 556.83,6640 TP297.1@560,6640 559.96,6574.27 740.53,6393.7 1035.47,6393.7 v1(1153.43,6275.74)
FAN_PWM: J1.25 Q2.3 R632.2 TP296.1 | length 6055
  Top Layer w10: R632.2@8140,3310 8140,3266.5 8165,3241.5 Q2.3@8200,3241.5 8235,3241.5 8256.07,3262.57 8256.07,3263.57 v1(8255.6,3263.57) ; J1.25@8531.5,8081.5 8581.5,8031.5 8581.5,7930.77 8622.59,7889.68 8844.16,7889.68 9123.32,7610.51 9123.32,5880.44 8967.63,5724.75 8657.14,5724.75 8550.03,5617.64 8550.03,4222.41 8563.87,4208.57 8563.87,4106.25 8625.49,4044.63 8625.49,4031.46 v1(8625.34,4031.3)
  Bottom Layer w10: v1(8255.6,3263.57) 8358.57,3263.57 TP296.1@8420,3325 8646.85,3551.85 8646.85,3876.67 8625.49,3898.03 8625.49,4031.3 v1(8625.34,4031.3)
FUSE_FAULT: D186.3 J2.45 R1151.1 R1274.1 TP533.1 | length 631
  Top Layer w10: D186.3@910,7761.5 R1151.1@1060,7761.5 ; R1151.1@1060,7760 R1151.1@1060,7761.5 ; J2.45@1102.36,8081.5 1056.52,8035.65 1056.52,7794.09 1060,7790.61 ; R1274.1@1170,7760 1170,7780.89 1160.28,7790.61 1060,7790.61 ; R1151.1@1060,7761.5 1060,7790.61
  Bottom Layer w10: J2.45@1102.36,8081.5 1105,8081.5 TP533.1@1105,8080
FUSE_FAULT_I: Q93.2 R630.2 R1036.2 TP534.1 | length 6625.5
  Top Layer w10: Q93.2@867.5,6988.5 867.5,6969.34 902.5,6969.34 941.64,6930.2 1019.66,6930.2 1075.74,6874.12 1075.74,6531.83 1065.36,6521.46 1065.36,6282.97 1132.42,6215.91 1132.42,4599.2 1206.48,4525.14 1206.48,3250.47 1138.48,3182.47 1138.48,1546.65 839.36,1247.53 839.36,1087.59 876.94,1050 954.88,1050 970,1034.88 R630.2@970,1000 R1036.2@1035,1000 ; v1(1035,1052.09) R1036.2@1035,1000 ; R1036.2@1040,1000 R1036.2@1035,1000
  Bottom Layer w10: v1(1035,1052.09) TP534.1@1035,1100
GND: C1.2 C3.2 C4.2 C5.2 C6.2 C7.2 C8.2 C11.1 C13.1 C14.1 C17.2 C18.2 C19.2 C20.2 C21.2 C22.2 C23.2 C24.2 C25.2 C27.2 C28.2 C29.2 C30.2 C31.2 C32.2 C33.2 C34.2 C35.2 C36.2 C37.2 C38.2 C219.2 C220.2 C224.2 C225.2 C226.2 C227.2 C228.2 C229.2 C230.2 C231.2 C232.2 C238.2 C239.2 C241.2 C242.2 C243.2 C244.2 C245.2 C246.2 C248.2 C249.2 C250.2 C253.2 C255.2 C256.2 C257.2 C259.2 C260.2 C261.2 C262.2 C263.2 C264.2 C265.2 C266.2 C267.2 C268.2 C269.2 C270.2 C271.2 C272.2 C273.2 C274.2 C275.2 C279.2 C280.2 C281.2 C282.2 C284.2 C285.2 C286.2 C287.2 C289.2 C290.2 C291.2 C292.2 C293.2 C295.2 C297.2 C298.2 C299.2 C300.2 C301.2 C303.2 C304.2 C305.2 C306.2 C307.2 C308.2 C309.2 C310.2 C311.2 C312.2 C313.2 C314.2 C315.2 C316.2 C317.2 C318.2 C319.2 C320.1 C321.1 C322.1 C323.1 C324.1 C325.1 C326.1 C327.1 C328.1 C329.1 C330.2 C331.2 C332.2 C333.2 C334.2 C335.2 C336.2 C337.2 C338.2 C339.2 C340.2 C341.2 C342.2 C343.2 C344.2 C345.2 C346.2 C347.2 C348.2 C351.2 C352.2 C353.2 C354.2 C355.1 C356.1 C357.1 C358.1 C359.2 C360.2 C361.1 C362.1 C363.1 C364.1 C365.1 C366.1 C367.1 C368.1 C369.1 C370.1 C371.1 C372.1 C373.1 C374.1 C375.1 C376.1 C377.1 C384.1 C402.2 C403.2 C404.1 C405.1 C406.1 C407.1 C408.1 C409.1 C410.1 C411.1 C413.1 C414.1 C415.1 C416.1 C417.1 C418.1 C419.1 C420.1 C421.1 C422.1 C423.1 C424.2 C425.2 C426.2 C427.1 C428.1 C429.2 C430.1 C431.2 C432.2 C433.2 C434.2 C435.2 C436.1 C438.2 C440.2 C441.2 C498.2 C507.2 C508.2 C509.2 C510.2 C511.2 C512.2 C513.2 C514.2 C515.2 C516.2 C517.2 C518.2 C524.2 C526.2 C528.2 C529.2 C530.2 C531.2 C535.2 C536.2 C537.2 C538.2 C539.2 C540.1 C541.1 C542.2 C543.1 C544.1 C545.1 C546.1 C547.2 C548.2 C549.2 C556.2 C557.2 C558.2 C559.2 C560.2 C561.2 C566.2 C568.2 C571.2 C572.2 C573.2 C574.2 C576.2 C578.2 C583.2 C584.2 C585.2 C590.2 C604.2 C605.2 C606.2 C607.2 C608.2 C609.2 C610.2 C611.2 C612.2 C613.2 C614.2 C615.2 C617.2 C618.2 C619.2 C620.2 C621.2 C622.2 C623.2 C624.2 C625.2 C626.1 C627.2 C629.2 C630.2 C631.2 C632.2 C633.2 C634.2 C635.2 C636.2 C637.2 C639.2 C640.2 C641.2 C642.2 C643.2 C644.2 C645.2 C646.2 C647.2 C648.2 C649.2 C651.2 C654.2 C656.2 C657.2 C658.2 C659.2 C660.2 C661.2 C662.2 C663.2 C664.2 C665.2 C666.2 C667.2 C668.2 C669.2 C671.2 C672.2 C674.2 C675.2 C676.2 C677.2 C678.2 C679.2 C681.2 C692.2 C695.2 C704.2 C707.2 C727.2 C728.2 C730.1 C731.2 C733.2 C734.2 C735.2 C736.2 C737.2 C738.2 C740.2 C741.2 C743.2 C744.2 C745.2 C746.2 C747.2 C748.2 C750.2 C759.2 C761.1 C762.1 C763.1 C764.1 C765.1 C766.1 C767.1 C768.1 C769.1 C770.1 C771.2 C778.1 C784.2 C785.2 C786.2 C787.2 C788.2 C789.2 C790.2 C791.2 C792.2 C793.2 C794.2 C795.2 C796.2 C797.2 C798.2 C799.2 C800.2 C801.2 C802.2 C803.2 C806.2 C807.2 C808.2 C809.2 C810.2 C811.2 C816.2 C817.2 C818.2 C819.2 C820.2 C821.2 C822.2 C823.2 C824.2 C825.2 C829.1 C876.2 C877.2 C880.2 C881.2 C882.2 C883.2 C885.2 C886.2 C896.2 C897.2 C907.2 C911.2 C912.1 C916.2 C917.1 C918.2 C919.2 C928.2 C929.2 C937.2 C938.2 C939.2 C940.2 C941.2 C942.2 C943.2 C944.2 C945.2 C954.1 C955.2 C956.1 C965.2 C966.2 C967.2 C968.2 C969.2 C970.2 C971.2 C972.2 C973.2 C974.2 C975.2 C976.2 C977.2 C978.2 C979.2 C980.2 C981.2 C982.2 C983.2 C984.2 C985.2 C986.2 C987.2 C988.2 C989.2 C990.2 C991.2 C992.2 C993.2 C994.2 C995.2 C996.2 C997.2 C998.2 C999.2 C1000.2 C1001.2 C1002.2 C1003.2 C1004.2 C1005.2 C1006.2 C1007.2 C1008.2 C1009.2 C1010.2 C1011.2 C1012.2 C1013.2 C1015.2 C1016.2 C1017.2 C1018.2 C1019.2 C1020.2 C1021.2 C1022.2 C1023.2 C1024.2 C1025.2 C1026.2 C1027.2 C1028.1 C1029.2 C1030.2 C1031.2 C1032.2 C1033.2 C1034.2 C1035.1 C1036.2 C1037.2 C1038.2 C1039.2 C1040.2 C1041.2 C1043.1 C1044.1 C1045.1 C1046.1 C1050.2 C1051.2 C1052.2 C1053.1 C1054.1 C1055.1 C1056.1 C1057.1 C1058.1 C1059.1 C1060.1 C1061.1 C1062.2 C1063.2 C1064.2 C1065.2 C1066.2 C1067.2 C1068.2 C1069.2 C1070.2 C1071.2 C1072.2 C1073.2 C1074.2 C1075.1 C1076.1 C1077.1 C1078.1 C1079.1 C1080.2 C1081.2 C1082.2 C1083.2 C1084.1 C1088.1 C1089.1 C1090.1 C1091.1 C1092.1 C1093.1 C1094.1 C1095.1 C1096.1 C1097.1 C1098.1 C1099.1 C1100.2 C1101.1 C1103.2 C1104.2 C1105.2 C1106.2 C1107.2 C1108.2 C1109.2 C1110.2 C1111.2 C1112.2 C1113.2 C1114.2 C1115.2 C1116.1 C1117.1 C1118.1 C1119.1 C1120.1 C1121.1 C1122.1 C1123.1 C1124.1 C1125.1 C1126.1 C1127.1 C1128.1 C1129.1 C1130.1 C1131.1 C1132.1 C1133.1 C1134.1 C1137.2 C1138.2 C1139.2 C1140.2 C1141.2 C1142.1 C1143.1 C1144.2 C1145.2 C1146.2 C1147.2 C1148.1 C1149.1 C1150.1 C1151.1 C1152.1 C1153.1 C1154.1 C1155.1 C1156.1 C1157.2 C1158.1 C1159.1 C1160.1 C1161.1 C1162.1 C1163.1 C1164.1 C1165.1 C1166.1 C1167.1 C1168.1 C1169.1 C1170.1 C1171.1 C1172.1 C1173.1 C1174.2 C1175.1 C1176.2 C1177.2 C1178.1 C1200.2 C1203.2 C1206.2 C1209.2 C1212.2 C1215.2 C1218.2 C1221.2 C1224.2 C1227.2 C1230.2 C1233.2 C1236.2 C1239.2 C1242.2 C1245.2 C1248.2 D2.2 D3.2 D8.1 D9.1 D10.1 D11.1 D12.1 D13.1 D14.1 D15.1 D16.1 D17.1 D18.1 D19.1 D20.1 D21.1 D22.1 D23.1 D24.1 D25.1 D26.1 D27.1 D28.1 D29.1 D30.1 D31.1 D32.1 D33.1 D34.1 D35.1 D36.1 D37.1 D38.1 D39.1 D40.1 D41.1 D42.1 D43.1 D44.1 D46.1 D53.1 D54.1 D55.1 D56.1 D57.1 D58.1 D186.1 D186.2 D194.1 D211.3 D212.3 D213.3 D214.3 D215.3 D229.3 D230.3 D231.3 D232.3 D233.3 D234.3 D240.3 D241.3 D242.3 D243.3 D247.3 D250.3 D253.3 D254.3 D337.1 D338.1 D339.1 J1.10 J1.23 J1.24 J1.27 J2.23 J2.24 J2.37 J2.38 J3.9 J3.10 J3.26 J4.2 J5.3 J6.3 J7.3 J7.6 J7.7 J8.4 J8.8 J8.10 J8.12 J9.2 J9.10 J10.4 J10.8 J10.10 J10.12 J11.2 J11.10 J12.1 J18.1 J19.1 Q1.2 Q2.2 Q3.2 Q4.2 Q9.2 Q11.2 Q12.2 Q13.2 Q14.2 Q18.2 Q19.2 Q20.2 Q21.2 Q22.2 Q23.2 Q24.2 Q25.2 Q26.2 Q28.2 Q29.2 Q30.2 Q32.2 Q33.2 Q34.2 Q40.2 Q41.2 Q42.2 Q43.2 Q44.2 Q45.2 Q46.2 Q47.2 Q48.2 Q49.2 Q50.2 Q51.2 Q52.2 Q55.2 Q56.2 Q62.2 Q68.2 Q69.2 Q73.2 Q74.2 Q75.2 Q76.2 Q93.3 Q95.2 Q96.2 Q97.2 Q98.2 Q99.2 Q100.2 Q101.2 Q102.2 Q103.2 Q104.2 Q105.2 Q106.2 Q107.2 Q108.2 Q110.2 Q111.2 Q113.2 Q114.2 Q128.2 Q129.2 Q131.2 Q133.2 Q135.2 Q137.2 Q139.2 Q141.2 Q143.2 Q145.2 Q147.2 Q149.2 Q151.2 Q152.2 Q153.2 Q155.2 Q156.2 Q160.2 Q175.2 Q176.2 Q177.2 Q178.3 Q179.3 Q180.3 Q181.3 Q182.3 Q183.3 Q184.3 Q185.3 Q186.2 Q187.2 Q188.3 Q189.3 Q190.3 Q191.3 Q192.3 Q193.3 Q194.3 Q195.3 Q196.3 Q197.3 Q198.3 Q199.3 Q200.3 Q201.3 Q202.3 Q203.3 Q204.3 Q205.3 Q206.3 Q207.3 Q208.3 Q209.3 Q210.2 Q212.2 Q227.3 Q228.3 Q229.3 Q230.3 Q231.3 Q232.3 Q233.3 Q234.3 Q235.3 Q236.3 Q237.3 Q238.3 Q239.3 Q240.3 Q241.2 R17.2 R20.2 R25.2 R71.1 R74.1 R605.2 R626.2 R628.2 R638.1 R643.1 R644.1 R645.1 R646.1 R647.1 R648.1 R649.1 R650.1 R651.1 R652.1 R653.1 R654.1 R660.1 R680.2 R707.2 R717.2 R743.2 R751.2 R753.2 R760.2 R782.1 R802.2 R806.2 R810.2 R816.2 R820.2 R824.2 R845.2 R847.2 R850.2 R858.1 R859.1 R862.2 R863.2 R867.2 R870.2 R874.2 R876.2 R962.1 R964.1 R1081.2 R1097.1 R1098.1 R1099.1 R1100.1 R1101.2 R1242.1 R1244.1 R1279.2 R1290.2 R1315.2 R1317.2 R1320.1 R1354.1 R1356.2 R1357.2 R1358.1 R1359.1 R1360.1 R1361.1 R1362.1 R1363.1 R1364.1 R1365.1 R1366.1 R1367.1 R1369.1 R1370.2 R1371.2 R1372.1 R1373.1 R1374.2 R1375.2 R1376.2 R1377.2 R1378.2 R1380.1 R1381.1 R1382.1 R1383.1 R1384.1 R1385.1 R1386.1 R1387.1 R1412.2 R1413.2 R1414.2 R1415.2 R1416.2 R1417.2 R1420.2 R1448.2 R1457.2 R1459.1 R1474.2 R1475.2 R1478.1 R1485.1 R1486.1 R1487.1 R1492.2 R1493.2 R1494.2 R1605.2 R1607.2 R1611.1 R1612.1 R1613.1 R1614.1 R1628.2 R1631.2 R1633.2 R1634.1 R1635.1 R1643.2 R1668.2 R1670.2 R1672.2 R1674.1 R1675.1 R1676.1 R1677.1 R1678.1 R1679.1 R1680.1 R1681.1 R1682.1 R1683.1 R1684.1 R1685.1 R1686.1 R1687.1 R1690.2 R1691.2 R1692.2 R1694.1 R1695.1 R1696.1 R1697.1 R1724.1 R1743.2 R1774.2 R1775.2 R1776.2 R1777.2 R1778.2 R1779.2 R1826.1 R1827.1 R1828.1 R1829.1 R1830.1 R1831.1 R1832.1 R1833.1 R1834.1 R1835.1 R1836.2 R1837.1 R1838.1 R1839.1 R1840.2 R1938.2 R1946.2 R1956.1 R1957.1 R1958.1 R1959.1 R1960.1 R1961.1 R1962.1 R1963.1 R1964.1 R1965.1 R1966.1 R1967.1 R1968.1 R1969.1 R1988.2 R1990.2 R2037.2 R2038.2 R2041.2 R2042.2 R2043.2 R2078.2 R2087.1 R2089.2 R2092.1 R2099.1 R2100.2 R2101.2 R2102.2 R2103.2 R2104.2 R2105.2 R2106.2 R2107.2 R2208.1 R2209.1 R2210.1 R2211.1 R2212.1 R2213.1 R2214.1 R2215.1 R2216.1 R2217.1 R2218.1 R2219.1 R2220.1 R2222.1 R2225.1 R2230.1 R2274.1 R2276.2 R2277.2 R2278.2 R2279.2 R2280.2 R2281.2 R2287.2 R2288.2 R2290.2 R2291.2 R2292.2 R2293.2 R2304.1 R2305.1 R2311.1 R2323.2 R2324.2 R2325.2 R2326.2 R2327.2 R2328.2 R2329.2 R2330.2 R2331.2 R2332.2 R2333.2 R2334.2 R2335.2 R2336.2 R2337.2 R2338.2 R2339.2 R2340.2 R2341.2 R2342.2 R2355.2 R2356.2 R2374.1 R2375.1 R2376.1 R2383.2 R2396.2 R2397.2 R2398.2 R2399.2 R2404.2 R2405.2 R2406.2 R2407.2 R2408.1 R2409.2 R2415.2 R2504.1 R2506.1 R2507.1 R2509.1 R2510.2 R2512.2 R2513.2 R2522.1 R2523.2 R2524.2 R2525.2 R2526.2 R2527.2 R2528.2 R2529.2 R2530.2 R2531.2 R2532.2 R2535.2 R2536.2 R2551.2 R2552.2 R2553.2 R2554.2 R2555.2 R2556.2 R2557.2 R2558.2 R2559.2 R2583.2 R2584.2 R2585.2 R2586.2 R2587.2 R2588.2 R2589.2 R2590.2 R2591.2 R2592.2 R2593.2 R2594.2 R2595.2 R2596.2 R2597.2 R2598.2 R2599.2 R2600.2 R2601.2 R2602.2 R2603.2 R2604.2 R2605.2 R2606.2 R2607.2 R2608.2 R2609.2 R2610.2 R2611.2 R2621.1 R2622.1 R2623.1 R2624.1 R2625.1 R2626.1 R2627.1 R2628.1 R2629.1 R2644.2 R2645.2 R2646.2 R2651.2 R2652.1 R2653.2 R2654.2 R2655.2 R2656.2 R2657.2 R2658.2 R2659.2 R2660.2 R2661.2 R2662.2 R2663.2 R2664.2 R2665.2 R2666.2 R2716.2 R2717.2 R2718.2 R2719.2 R2721.2 R2722.2 R2723.2 R2724.2 R2725.1 R2732.1 R2734.2 TP9.1 TP10.1 TP11.1 TP1672.1 TP1673.1 TP1674.1 TP1675.1 TP1726.1 U1.2 U1.11 U1.13 U1.14 U1.24 U1.25 U1.39 U1.41 U1.49 U1.55 U1.62 U1.69 U1.77 U1.87 U1.88 U1.89 U1.94 U2.1 U2.10 U2.19 U3.A1 U3.A16 U3.B2 U3.B15 U3.G7 U3.G8 U3.G9 U3.G10 U3.H7 U3.H9 U3.J8 U3.J10 U3.K7 U3.K8 U3.K9 U3.K10 U3.R2 U3.R15 U3.T1 U3.T16 U4.2 U4.11 U4.13 U4.14 U4.24 U4.25 U4.39 U4.41 U4.49 U4.55 U4.62 U4.69 U4.77 U4.87 U4.88 U4.89 U4.94 U5.1 U5.10 U5.19 U6.A1 U6.A16 U6.B2 U6.B15 U6.G7 U6.G8 U6.G9 U6.G10 U6.H7 U6.H9 U6.J8 U6.J10 U6.K7 U6.K8 U6.K9 U6.K10 U6.R2 U6.R15 U6.T1 U6.T16 U7.2 U8.4 U9.3 U10.1 U10.2 U10.3 U10.4 U11.1 U11.2 U11.3 U11.4 U12.1 U12.11 U13.6 U13.8 U13.9 U14.6 U14.8 U14.9 U15.1 U15.11 U16.3 U16.7 U16.9 U17.1 U19.3 U19.6 U20.6 U20.8 U20.13 U21.4 U22.1 U22.8 U22.9 U23.2 U24.2 U25.2 U26.2 U27.2 U28.4 U28.5 U29.4 U29.5 U30.7 U42.5 U43.5 U55.5 U56.5 U119.6 U119.8 U120.6 U120.8 U122.6 U122.8 U123.6 U123.8 U124.6 U124.8 U125.6 U125.8 U139.6 U139.7 U139.8 U147.7 U149.1 U149.2 U149.7 U151.7 U152.7 U153.1 U153.2 U153.7 U154.1 U154.2 U154.7 U163.3 U211.5 U211.6 U211.7 U212.5 U212.6 U212.7 U212.12 U212.13 U214.6 U214.7 U214.8 U214.9 U214.10 U214.11 U236.6 U236.7 U236.8 U237.6 U237.7 U237.8 U238.6 U238.7 U238.8 U240.7 U243.6 U243.7 U243.8 U244.6 U244.7 U244.8 U251.7 U254.7 U261.2 U262.6 U262.7 U262.8 U262.9 U262.10 U262.19 Y1.2 | length 97289.2
  Top Layer w5: U6.H7@2339.68,1459.06 2359.03,1478.4 v2(2360.22,1478.4) 2365.97,1472.64 2365.97,1472.14 U6.G7@2379.06,1459.06 ; v1(4610.62,1420.63) v1@4614.68,1420.63 ; v1(4623.95,1683.56) 4627,1686.61 4633.5,1686.61 v1@4633.5,1676.54 ; v1@8833.47,1930.07 8833.71,1930.07 8833.71,1929.51 8839.36,1929.51 v1@8840.18,1930.33
  Top Layer w6: U6.T16@2024.72,1104.72 2024.72,1109.19 2059.62,1144.09 U6.R15@2064.09,1144.09 ; U6.B2@2575.91,1655.91 U6.A1@2615.28,1695.28 ; U3.K8@8330.94,1259.68 8311.26,1279.37 v2(8311.26,1280.56) 8311.26,1290.62 8330.94,1290.62 U3.K7@8330.94,1299.06
  Top Layer w9: U4.69@4074.88,1341.89 4118.88,1341.89 4125.7,1335.07 4157.26,1335.07 v1(4182.26,1360.06) ; U4.62@4074.88,1479.68 4125.94,1479.68 v1(4140.75,1494.5) ; U4.55@4074.88,1617.48 v1(4135.69,1617.48) ; v1(4158.65,1247.99) 4163.46,1243.17 U4.77@4163.46,1154.88 ; v1(4163.46,1702.12) U4.49@4163.46,1765.12 ; v1(4317.91,1632.11) 4320.94,1632.11 U4.41@4320.94,1765.12 4321.13,1765.3 4321.13,1800.62 4329.62,1809.12 4351.64,1809.12 4360.13,1800.62 4360.13,1765.3 U4.39@4360.31,1765.12 ; U4.87@4360.31,1154.88 4360.31,1183.87 4371.01,1194.56 4380,1194.56 ; U4.88@4380,1154.88 4380,1194.56 ; v1(4380,1225.14) 4380,1195.41 ; U4.89@4399.69,1154.88 4399.69,1187.29 4391.56,1195.41 4380,1195.41 ; U4.94@4498.11,1154.88 4498.11,1208.77 v1(4516.43,1227.08) ; v1@4614.68,1420.63 U4.11@4685.12,1420.63 ; v1(4621.66,1479.63) 4621.72,1479.68 U4.14@4685.12,1479.68 ; v1@4626.66,1474.63 4641.29,1460 U4.13@4685.12,1460 ; v1@4627,1686.61 4636.61,1696.22 U4.25@4685.12,1696.22 ; v1(4630.48,1238.29) 4635.48,1243.29 4636.94,1243.29 4637.11,1243.46 U4.2@4685.12,1243.46 ; v1@4633.5,1676.54 U4.24@4685.12,1676.54 ; U1.49@6074.88,1263.46 6121.61,1263.46 v1(6130.94,1272.79) ; U1.41@6074.88,1420.94 6157.89,1420.94 v1(6178.83,1400) ; U1.39@6074.88,1460.32 6129.52,1460.32 6139.2,1470 v1(6179.34,1470) ; U1.25@6143.78,1785.12 6143.78,1747.64 6144.1,1747.32 6146.8,1747.32 ; v1(6148.93,1722.98) 6148.93,1739.37 6147.18,1741.12 6147.18,1746.93 6146.8,1747.32 ; U1.24@6163.46,1785.12 6163.46,1758.63 6152.15,1747.32 6146.8,1747.32 ; v1(6217.01,1230.14) 6222.52,1224.63 U1.55@6222.52,1174.88 ; v1(6353.99,1236.55) 6360.31,1230.23 U1.62@6360.31,1174.88 ; U1.14@6360.31,1785.12 6360.31,1829.49 6365.72,1834.9 6375.57,1834.9 6375.67,1835 v1(6397.65,1856.98) ; U1.13@6380,1785.12 6380,1832.92 6382.08,1835 6397.65,1850.57 v1(6397.65,1856.98) ; U1.11@6419.37,1785.12 6419.37,1835 6419.37,1835.27 v1(6397.65,1856.98) ; U1.69@6498.11,1174.88 6498.11,1219.05 6512.43,1233.38 v1(6512.43,1246.45) ; U1.2@6596.54,1785.12 6596.54,1820.44 6605.21,1829.12 6627.23,1829.12 6629.1,1827.25 v1(6644.25,1827.25) ; v1(6624.43,1607.21) 6628.79,1607.21 6637.89,1598.11 U1.94@6685.12,1598.11 ; U1.77@6685.12,1263.46 6731.32,1263.46 6740,1254.78 v1(6741.13,1253.65) ; U1.87@6685.12,1460.32 6733.79,1460.32 6740,1466.53 6740.58,1467.1 v1@6740.58,1479.95 ; U1.88@6685.12,1480 6724.42,1480 ; U1.89@6685.12,1499.68 6725.05,1499.68 6728.86,1495.88 6728.86,1484.43 6724.42,1480 ; v1(6745.74,1479.95) v1@6740.58,1479.95 ; 4380,1194.56 4380,1195.41 ; 6724.42,1480 6729.12,1480 6729.17,1479.95 6740,1479.95 v1@6740.58,1479.95
  Top Layer w10: v1(605.79,4186.2) 610.43,4190.85 U262.19@610.43,4251.61 ; U262.6@712.8,4028.39 712.8,4085.4 722.44,4095.04 v1@738.39,4095.04 ; U262.7@738.39,4028.39 738.39,4077.85 ; v1(742.34,4095.31) v1@738.39,4095.31 ; U262.8@763.98,4028.39 763.98,4073.48 759.61,4077.85 738.39,4077.85 ; U262.9@789.57,4028.39 789.57,4102.25 ; U262.10@815.16,4028.39 815.16,4096.33 809.24,4102.25 789.57,4102.25 ; R820.2@1710,7270 1708.79,7270 1708.79,7315.65 v1(1711.84,7318.69) ; v2(2005.04,1085.04) U6.T16@2024.72,1104.72 ; v2(2005.04,1714.96) U6.T1@2024.72,1695.28 ; v2(2044.41,1675.59) U6.R2@2064.09,1655.91 ; v1(2140,7000.52) C559.2@2140,7050 ; v2(2241.26,1360.63) U6.K9@2260.94,1380.32 ; v2(2241.26,1439.37) U6.K8@2260.94,1419.68 ; v2(2241.26,1478.74) U6.K7@2260.94,1459.06 ; v2(2280.63,1321.26) U6.J10@2300.32,1340.94 ; v2(2280.63,1439.37) U6.J8@2300.32,1419.68 ; U6.H9@2339.68,1380.32 2346.76,1380.32 2349.07,1382.63 2379.06,1382.63 U6.G9@2379.06,1380.32 2397.55,1361.82 v2(2397.55,1360.63) 2397.55,1359.44 U6.G10@2379.06,1340.94 ; U6.G8@2379.06,1419.68 v2(2398.74,1439.37) ; U6.B15@2575.91,1144.09 v2(2595.59,1124.41) ; v1(2609,7003.83) C995.2@2610,7050 ; U6.A16@2615.28,1104.72 2615.28,1106.78 2652.36,1106.78 v2(2652.36,1104.23) ; U6.A1@2615.28,1695.28 v2(2634.96,1714.96) ; v1(3154.19,2258.7) U15.1@3194.84,2258.7 ; v1(3425.16,2449.68) U15.11@3425.16,2521.3 ; v1(3964.83,521.14) 3964.83,526.84 4054.84,526.84 U5.1@4054.84,538.39 ; C246.2@3990,720 4012.39,720 4030.63,701.76 4063.89,701.76 4080.43,718.3 U5.19@4080.43,761.61 ; U5.10@4285.16,538.39 4285.16,581.67 4302.17,598.68 v1(4347.56,598.68) ; C769.1@5030,5585 5030,5640 ; C764.1@5030,5725 5030,5640 ; v1(5077.21,5649.7) v1@5077.21,5640 ; R1098.1@5140,5640 v1@5077.21,5640 ; R806.2@5390,7270 5434.02,7270 v1(5439.31,7275.29) ; v1(5825.17,697.67) 5834.84,707.34 U2.10@5834.84,761.61 ; U2.19@6039.57,538.39 6039.57,582.79 6046.16,589.39 6078.53,589.39 v1@6095.93,571.99 ; U2.1@6065.16,761.61 6067.91,761.61 6067.91,708.08 6090.31,685.69 6152.02,685.69 v1(6152.71,684.99) ; v2(8075.04,925.04) U3.T16@8094.72,944.72 ; U3.T1@8094.72,1535.28 v2(8114.41,1515.59) U3.R2@8134.09,1495.91 ; v2(8114.41,964.41) U3.R15@8134.09,984.09 ; v2(8311.26,1161.26) U3.K10@8330.94,1180.94 ; v2(8311.26,1200.63) U3.K9@8330.94,1220.32 ; v2(8350.63,1161.26) U3.J10@8370.32,1180.94 ; v2(8350.63,1279.37) U3.J8@8370.32,1259.68 ; U3.H9@8409.68,1220.32 v2(8429.37,1200.63) ; U3.H7@8409.68,1299.06 v2(8429.37,1318.74) ; U3.G10@8449.06,1180.94 v2(8468.74,1161.26) ; U3.G9@8449.06,1220.32 v2(8468.74,1200.63) ; U3.G8@8449.06,1259.68 v2(8468.74,1279.37) ; U3.G7@8449.06,1299.06 v2(8468.74,1318.74) ; U3.B15@8645.91,984.09 v2(8665.59,964.41) ; U3.B2@8645.91,1495.91 v2(8665.59,1515.59) ; U3.A16@8685.28,944.72 v2(8704.96,925.04) ; U3.A1@8685.28,1535.28 v2(8704.96,1554.96) ; v1@8840.18,1930.33 8854.84,1944.99 U12.1@8854.84,2008.7 ; U12.11@9085.16,2271.3 U12.11@9085.16,2274.82 ; C405.1@9390,7220 9421.95,7220 v1(9438.23,7236.29) ; v1(9390,7492.01) C1108.2@9390,7540 ; v1(9447.36,6900) R1361.1@9500,6900 ; R1366.1@9620,6900 v1(9669.67,6900) ; C410.1@9620,7220 9651.75,7220 v1(9663.82,7232.07) ; R1360.1@9950,6900 v1(10000.57,6900) ; v1(9987.5,7071.19) Q40.2@9987.5,7128.5 ; v1(10060,7489.2) C1105.2@10060,7540 ; R1364.1@10180,6900 10230.03,6900 v1(10235.99,6894.04) 10241.95,6900 R1365.1@10290,6900 ; C409.1@10280,7220 10323.96,7220 v1(10331.94,7227.98) 10331.94,7197.98 10359.92,7170 10389.5,7170 10427.5,7132 Q45.2@10427.5,7128.5 ; 738.39,4077.85 v1@738.39,4095.04 ; v1@738.39,4095.04 v1@738.39,4095.31 ; v1@738.39,4095.31 738.39,4098.83 742.34,4102.78 789.57,4102.78 789.57,4102.25 ; 5030,5640 v1@5077.21,5640
  Top Layer w12: v2(2241.26,1360.63) U6.K10@2260.94,1340.94
  Top Layer w15: C639.2@5820,7770 5853.5,7770 5863.5,7780 R2332.2@5930,7780 ; U12.11@9085.16,2274.82 9085.16,2321.65 v1(9109.05,2345.54)